# EAGLE board EMB1061_batch (EAGLE 9.6.2)
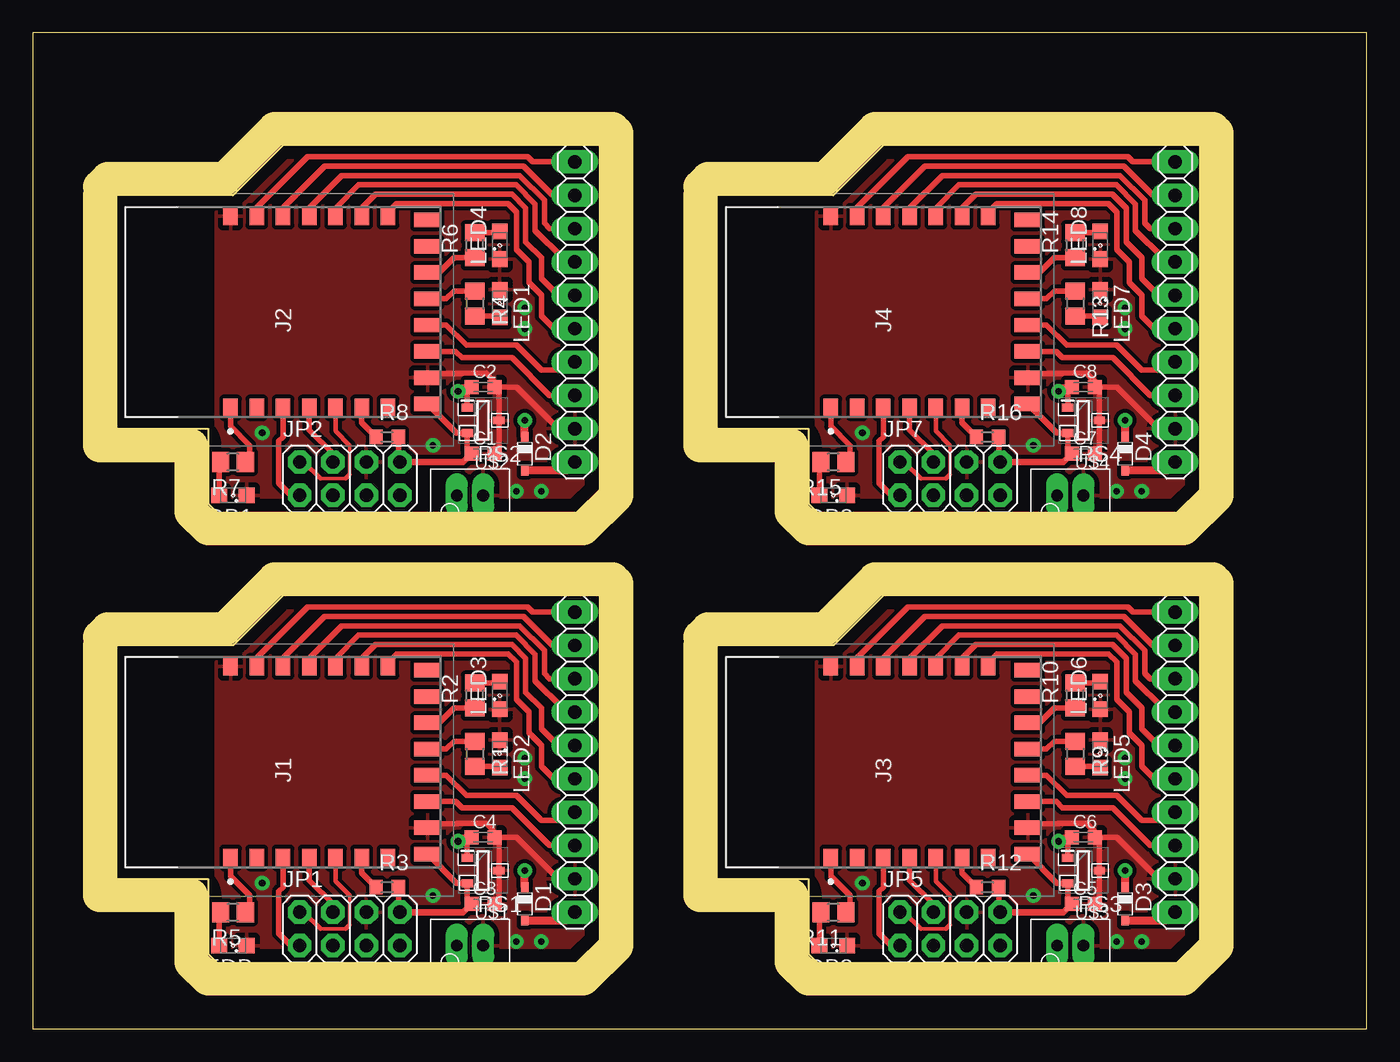
[diagram p0: board, top side]
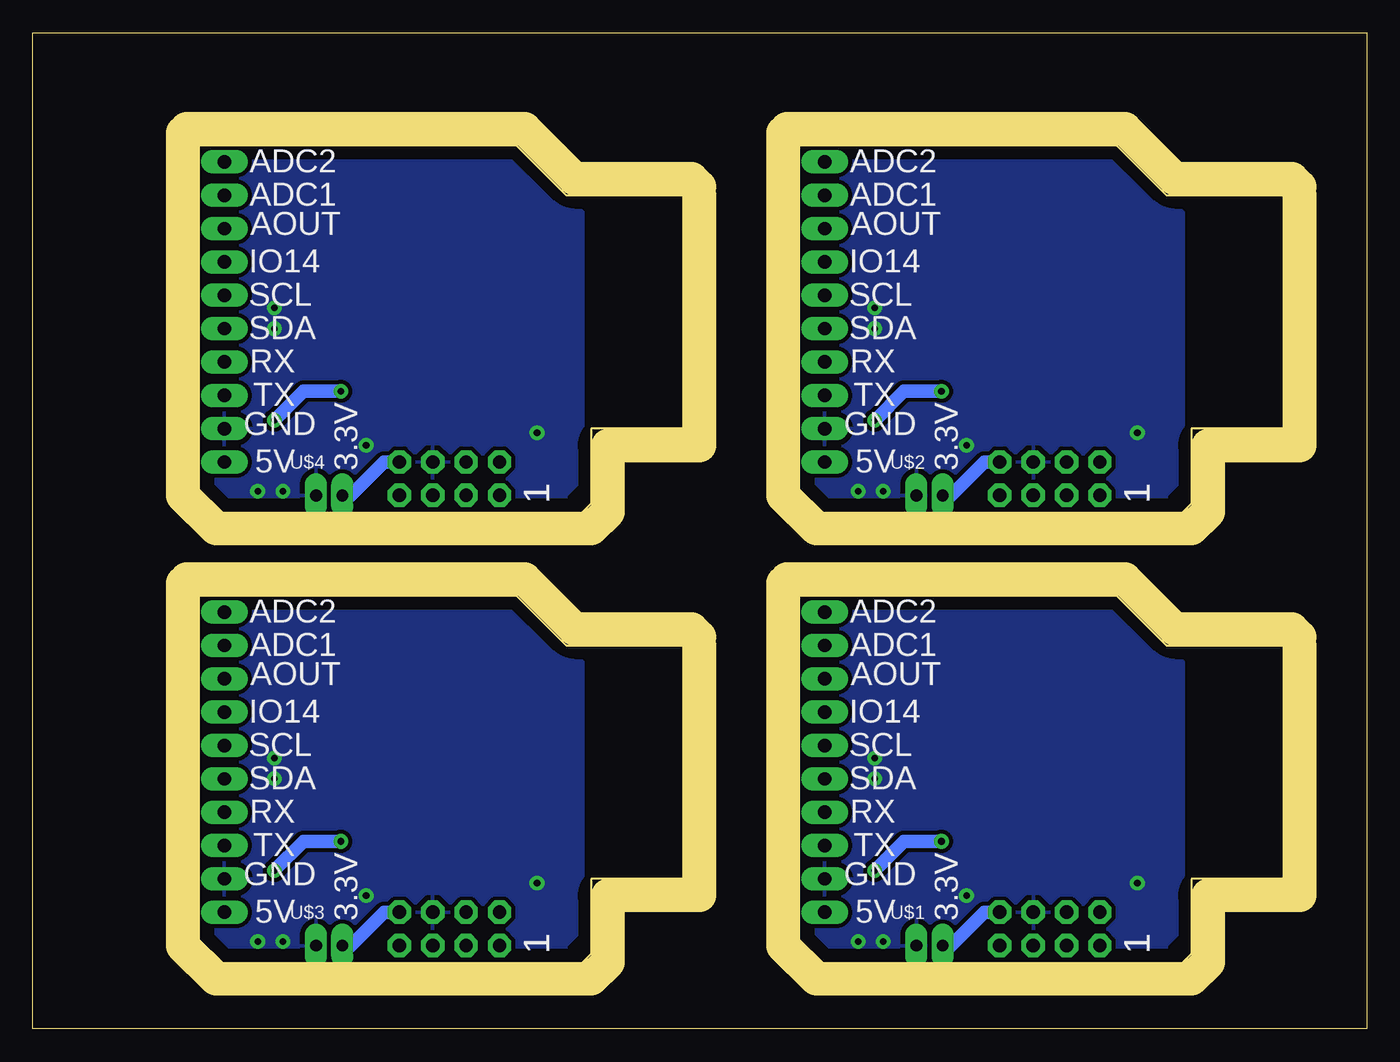
[diagram p1: board, bottom side, seen from below]

Size 101.58 x 75.87 mm. Coordinates in mm from the lower left corner, seen from the top.
Outline: 5.08,29.21 5.08,10.16 12.06,10.16 12.06,5.08 13.34,3.81 41.91,3.81 44.45,6.35 44.45,33.97 44.13,34.29 18.41,34.29 14.61,30.48 5.71,30.48 5.08,29.84
Outline: 5.08,63.5 5.08,44.45 12.06,44.45 12.06,39.37 13.34,38.1 41.91,38.1 44.45,40.64 44.45,68.26 44.13,68.58 18.41,68.58 14.61,64.77 5.71,64.77 5.08,64.14
Outline: 50.8,29.21 50.8,10.16 57.78,10.16 57.78,5.08 59.05,3.81 87.63,3.81 90.17,6.35 90.17,33.97 89.85,34.29 64.14,34.29 60.33,30.48 51.44,30.48 50.8,29.84
Outline: 50.8,63.5 50.8,44.45 57.78,44.45 57.78,39.37 59.05,38.1 87.63,38.1 90.17,40.64 90.17,68.26 89.85,68.58 64.14,68.58 60.33,64.77 51.44,64.77 50.8,64.14
Outline: 0,0 101.58,0 101.58,75.87 0,75.87 0,0
Copper layers (1*16): Top 0.035mm / dielectric 1.5mm / Bottom 0.035mm
Design rules "default *": minimum track width 6mil, minimum drill 0.35mm, track to track 12mil, track to pad 12mil, pad to pad 12mil, via to via 12mil, smd to smd 6mil, copper to edge 40mil, drill to drill 6mil, minimum pad ring 15mil, minimum via ring 12mil, stop-mask expansion 4mil, vias tented up to drill 0mil, thermal gap 16mil
Milling: 40 lines

## Footprints (pad centres in the part's own frame; a part is rotated, then mirrored left to right if it is on the bottom)
C0603K = smd 1.05 x 1.08: 1 -0.875,0; 2 0.875,0
SOD323_ST = smd 0.8 x 0.6: A 1.25,0; C -1.25,0
113990637 = smd 1.4 x 1.1: 1 -7.3,4; 2 -7.3,2; 3 -7.3,0; 4 -7.3,-2; 5 -7.3,-4; 6 -7.3,-6; 7 -7.3,-8; 16 7.3,-8; 17 7.3,-6; 18 7.3,-4; 19 7.3,-2; 20 7.3,0; 21 7.3,2; 22 7.3,4 | smd 1.1 x 2: 8 -7,-11; 9 -5,-11; 10 -3,-11; 11 -1,-11; 12 1,-11; 13 3,-11; 14 5,-11; 15 7,-11
2X04 = drill 1.016 octagon: 1 -3.81,-1.27; 2 -3.81,1.27; 3 -1.27,-1.27; 4 -1.27,1.27; 5 1.27,-1.27; 6 1.27,1.27; 7 3.81,-1.27; 8 3.81,1.27
1X10 = drill 1.016 long: 1 -11.43,0; 2 -8.89,0; 3 -6.35,0; 4 -3.81,0; 5 -1.27,0; 6 1.27,0; 7 3.81,0; 8 6.35,0; 9 8.89,0; 10 11.43,0
SML0805 = smd 1.2 x 1.2: A 1.05,0; C -1.05,0
SOT96P240X120-3N = smd 0.85 x 0.6: 1 -1.2,0.96; 2 -1.2,-0.96; 3 1.2,0
R0805 = smd 1.3 x 1.5: 1 -0.95,0; 2 0.95,0
R0603 = smd 1 x 1.1: 1 -0.85,0; 2 0.85,0
JST2.0MM_2PIN = drill 0.9 pad 1.27 long: 1 0,2; 2 0,0

## Placement (x,y rotation side)
C1  2.2uf  [C0603K]  34.29,43.81 0 top
C2  1uf  [C0603K]  34.29,48.9 0 top
C3  2.2uf  [C0603K]  34.29,9.53 0 top
C4  1uf  [C0603K]  34.29,14.61 0 top
C5  2.2uf  [C0603K]  80.01,9.53 0 top
C6  1uf  [C0603K]  80.01,14.61 0 top
C7  2.2uf  [C0603K]  80.01,43.81 0 top
C8  1uf  [C0603K]  80.01,48.9 0 top
D1  Diode  [SOD323_ST]  37.47,9.53 270 top
D2  Diode  [SOD323_ST]  37.47,43.81 270 top
D3  Diode  [SOD323_ST]  83.19,9.53 270 top
D4  Diode  [SOD323_ST]  83.19,43.81 270 top
J1  BlueNRG1  [113990637]  19.05,20.32 90 top
J2  BlueNRG1  [113990637]  19.05,54.61 90 top
J3  BlueNRG1  [113990637]  64.77,20.32 90 top
J4  BlueNRG1  [113990637]  64.77,54.61 90 top
JP1  [2X04]  24.13,7.62 0 top
JP2  [2X04]  24.13,41.91 0 top
JP3  [1X10]  41.27,20.32 270 top
JP4  [1X10]  41.27,54.61 270 top
JP5  [2X04]  69.85,7.62 0 top
JP6  [1X10]  87,20.32 270 top
JP7  [2X04]  69.85,41.91 0 top
JP8  [1X10]  87,54.61 270 top
LED1  LEDG  [SML0805]  35.56,55.24 270 top
LED2  LEDG  [SML0805]  35.56,20.95 270 top
LED3  LEDR  [SML0805]  35.56,25.4 90 top
LED4  LEDR  [SML0805]  35.56,59.69 90 top
LED5  LEDG  [SML0805]  81.28,20.95 270 top
LED6  LEDR  [SML0805]  81.28,25.4 90 top
LED7  LEDG  [SML0805]  81.28,55.24 270 top
LED8  LEDR  [SML0805]  81.28,59.69 90 top
LEDB  LEDB  [SML0805]  15.24,6.35 180 top
LEDB1  LEDB  [SML0805]  15.24,40.64 180 top
LEDB2  LEDB  [SML0805]  60.96,6.35 180 top
LEDB3  LEDB  [SML0805]  60.96,40.64 180 top
PS1  AP7381-33SA-7  [SOT96P240X120-3N]  34.29,12.06 0 top
PS2  AP7381-33SA-7  [SOT96P240X120-3N]  34.29,46.35 0 top
PS3  AP7381-33SA-7  [SOT96P240X120-3N]  80.01,12.06 0 top
PS4  AP7381-33SA-7  [SOT96P240X120-3N]  80.01,46.35 0 top
R1  1k  [R0805]  33.66,20.95 270 top
R2  1k  [R0805]  33.66,25.4 90 top
R3  10k  [R0603]  26.99,10.79 0 top
R4  1k  [R0805]  33.66,55.24 270 top
R5  1k  [R0805]  15.24,8.89 180 top
R6  1k  [R0805]  33.66,59.69 90 top
R7  1k  [R0805]  15.24,43.18 180 top
R8  10k  [R0603]  26.99,45.09 0 top
R9  1k  [R0805]  79.38,20.95 270 top
R10  1k  [R0805]  79.38,25.4 90 top
R11  1k  [R0805]  60.96,8.89 180 top
R12  10k  [R0603]  72.71,10.79 0 top
R13  1k  [R0805]  79.38,55.24 270 top
R14  1k  [R0805]  79.38,59.69 90 top
R15  1k  [R0805]  60.96,43.18 180 top
R16  10k  [R0603]  72.71,45.09 0 top
U$1  JST2.0MM_2PIN  [JST2.0MM_2PIN]  34.29,6.35 90 top
U$2  JST2.0MM_2PIN  [JST2.0MM_2PIN]  34.29,40.64 90 top
U$3  JST2.0MM_2PIN  [JST2.0MM_2PIN]  80.01,6.35 90 top
U$4  JST2.0MM_2PIN  [JST2.0MM_2PIN]  80.01,40.64 90 top

## Library data of the parts
C1-C8 = rcl; SPICEPREFIX: C
D1-D4 = diode
J1-J4 = SamacSys_Parts; DESCRIPTION: Bluetooth v4.2 (BLE) 3.3V 22-Pin; HEIGHT: 4mm; MANUFACTURER_NAME: Seeed Studio; MANUFACTURER_PART_NUMBER: 113990637; MOUSER_PART_NUMBER: 713-113990637; MOUSER_PRICE-STOCK: https://www.mouser.co.uk/ProductDetail/Seeed-Studio/113990637?qs=gZXFycFWdAMlTq%252B0pAB4jw%3D%3D
JP1-JP8 = pinhead
LED1-LED8 LEDB LEDB1-LEDB3 = led
PS1-PS4 = mouser-3.3v_AP7381-33SA-7; DESCRIPTION: LDO CMOS LowCurr SOT23 T&R 3K; HEIGHT: 1.2mm; MANUFACTURER_NAME: Diodes Inc.; MANUFACTURER_PART_NUMBER: AP7381-33SA-7; MOUSER_PART_NUMBER: 621-AP7381-33SA-7; MOUSER_PRICE-STOCK: https://www.mouser.co.uk/ProductDetail/Diodes-Incorporated/AP7381-33SA-7?qs=y6ZabgHbY%252ByfboEZm%252BnPlA%3D%3D
R1-R16 = rcl; SPICEPREFIX: R
U$1-U$4 = Gil

## Nets
+5V: D1.A JP3.10
+5V1: D2.A JP4.10
+5V2: D3.A JP6.10
+5V3: D4.A JP8.10
ADC1: J1.20 JP3.2
ADC2: J1.21 JP3.1
ADC3: J2.20 JP4.2
ADC4: J2.21 JP4.1
ADC5: J3.20 JP6.2
ADC6: J3.21 JP6.1
ADC7: J4.20 JP8.2
ADC8: J4.21 JP8.1
ANALOG_OUT: J1.19 JP3.3
ANALOG_OUT1: J2.19 JP4.3
ANALOG_OUT2: J3.19 JP6.3
ANALOG_OUT3: J4.19 JP8.3
BLUE: J1.1 R5.1
BLUE1: J2.1 R7.1
BLUE2: J3.1 R11.1
BLUE3: J4.1 R15.1
BOOT: J1.6 R3.1
BOOT1: J2.6 R8.1
BOOT2: J3.6 R12.1
BOOT3: J4.6 R16.1
GND: C3.2 C4.2 J1.9 J1.22 JP1.6 JP3.9 LED2.C LED3.C LEDB.C PS1.3 U$1.2
GND1: C1.2 C2.2 J2.9 J2.22 JP2.6 JP4.9 LED1.C LED4.C LEDB1.C PS2.3 U$2.2
GND2: C5.2 C6.2 J3.9 J3.22 JP5.6 JP6.9 LED5.C LED6.C LEDB2.C PS3.3 U$3.2
GND3: C7.2 C8.2 J4.9 J4.22 JP7.6 JP8.9 LED7.C LED8.C LEDB3.C PS4.3 U$4.2
I2C2_SCL: J1.17 JP3.5
I2C2_SCL1: J2.17 JP4.5
I2C2_SCL2: J3.17 JP6.5
I2C2_SCL3: J4.17 JP8.5
I2C2_SDA: J1.16 JP3.6
I2C2_SDA1: J2.16 JP4.6
I2C2_SDA2: J3.16 JP6.6
I2C2_SDA3: J4.16 JP8.6
IO1: J2.18 JP4.4
IO2: J3.18 JP6.4
IO3: J4.18 JP8.4
IO14: J1.18 JP3.4
LED1: J1.12 R1.1
LED2: J1.13 R2.1
LED3: J1.14
LED4: J1.15
LED5: J2.12 R4.1
LED6: J2.13 R6.1
LED7: J2.14
LED8: J2.15
LED9: J3.12 R9.1
LED10: J3.13 R10.1
LED11: J3.14
LED12: J3.15
LED13: J4.12 R13.1
LED14: J4.13 R14.1
LED15: J4.14
LED16: J4.15
N$1: LEDB.A R5.2
N$2: LED1.A R4.2
N$3: LED4.A R6.2
N$4: LEDB1.A R7.2
N$5: LED5.A R9.2
N$6: LED6.A R10.2
N$7: LEDB2.A R11.2
N$8: LED7.A R13.2
N$9: LED8.A R14.2
N$10: LEDB3.A R15.2
N$20: LED2.A R1.2
N$21: LED3.A R2.2
RESET: J1.3 JP1.1
RESET1: J2.3 JP2.1
RESET2: J3.3 JP5.1
RESET3: J4.3 JP7.1
RX: J1.11 JP3.7
RX1: J2.11 JP4.7
RX2: J3.11 JP6.7
RX3: J4.11 JP8.7
SWCLK: J1.5 JP1.2
SWCLK1: J2.5 JP2.2
SWCLK2: J3.5 JP5.2
SWCLK3: J4.5 JP7.2
SWDIO: J1.4 JP1.4
SWDIO1: J2.4 JP2.4
SWDIO2: J3.4 JP5.4
SWDIO3: J4.4 JP7.4
TX: J1.10 JP3.8
TX1: J2.10 JP4.8
TX2: J3.10 JP6.8
TX3: J4.10 JP8.8
VCC: C3.1 J1.8 JP1.8 PS1.2 R3.2 U$1.1
VCC1: C1.1 J2.8 JP2.8 PS2.2 R8.2 U$2.1
VCC2: C5.1 J3.8 JP5.8 PS3.2 R12.2 U$3.1
VCC3: C7.1 J4.8 JP7.8 PS4.2 R16.2 U$4.1
VIN: C4.1 D1.C PS1.1
VIN1: C2.1 D2.C PS2.1
VIN2: C6.1 D3.C PS3.1
VIN3: C8.1 D4.C PS4.1

## Tracks (layer width: path | path; a pad name or v marks a point on that pad's centre or on a via)
+5V
  Top 0.61: D1.A 40.66,8.28 JP3.10
+5V1
  Top 0.61: D2.A 40.66,42.56 JP4.10
+5V2
  Top 0.61: D3.A 86.38,8.28 JP6.10
+5V3
  Top 0.61: D4.A 86.38,42.56 JP8.10
ADC1
  Top 0.406: JP3.2 39.58,29.21 37.37,31.42 22.21,31.42 19.05,28.25 J1.20
ADC2
  Top 0.406: JP3.1 38.05,31.75 37.67,32.13 20.93,32.13 17.05,28.25 J1.21
ADC3
  Top 0.406: JP4.2 39.58,63.5 37.37,65.71 22.21,65.71 19.05,62.55 J2.20
ADC4
  Top 0.406: JP4.1 38.05,66.04 37.67,66.42 20.93,66.42 17.05,62.55 J2.21
ADC5
  Top 0.406: JP6.2 85.3,29.21 83.09,31.42 67.94,31.42 64.77,28.25 J3.20
ADC6
  Top 0.406: JP6.1 83.77,31.75 83.39,32.13 66.65,32.13 62.77,28.25 J3.21
ADC7
  Top 0.406: JP8.2 85.3,63.5 83.09,65.71 67.94,65.71 64.77,62.55 J4.20
ADC8
  Top 0.406: JP8.1 83.77,66.04 83.39,66.42 66.65,66.42 62.77,62.55 J4.21
ANALOG_OUT
  Top 0.406: J1.19 21.05,28.22 23.54,30.71 37.08,30.71 38.96,28.82 38.96,27.08 39.37,26.67 JP3.3
ANALOG_OUT1
  Top 0.406: J2.19 21.05,62.51 23.54,65 37.08,65 38.96,63.11 38.96,61.37 39.37,60.96 JP4.3
ANALOG_OUT2
  Top 0.406: J3.19 66.77,28.22 69.25,30.71 82.8,30.71 84.68,28.82 84.68,27.08 85.09,26.67 JP6.3
ANALOG_OUT3
  Top 0.406: J4.19 66.77,62.51 69.25,65 82.8,65 84.68,63.11 84.68,61.37 85.09,60.96 JP8.3
BLUE
  Top 0.406: J1.1 15.05,11.62 16.51,10.16 16.51,9.21 R5.1
BLUE1
  Top 0.406: J2.1 15.05,45.91 16.51,44.45 16.51,43.5 R7.1
BLUE2
  Top 0.406: J3.1 60.77,11.62 62.23,10.16 62.23,9.21 R11.1
BLUE3
  Top 0.406: J4.1 60.77,45.91 62.23,44.45 62.23,43.5 R15.1
BOOT
  Top 0.406: J1.6 25.05,11.88 R3.1
BOOT1
  Top 0.406: J2.6 25.05,46.17 R8.1
BOOT2
  Top 0.406: J3.6 70.77,11.88 R12.1
BOOT3
  Top 0.406: J4.6 70.77,46.17 R16.1
GND  (via drill 0.5)
  Top 0.406: JP3.9 40.01,11.43 36.83,14.61 35.56,14.61 | 35.56,14.61 C4.2 35.49,14.28 PS1.3 35.49,9.85 C3.2 | J1.9 30.37,15.64 32.35,15.64 32.36,15.65 34.51,15.65 35.56,14.61
  other vias: 17.46,11.11 37.47,19.05 36.83,6.67 38.73,6.67 30.48,10.16 37.47,20.64
  pour Bottom: 13.97,27.94 19.05,33.02 40.64,33.02 41.91,31.75 41.91,6.35 40.64,5.08 15.24,5.08 15.24,6.35 13.97,7.62
  pour Top: 13.97,27.94 19.05,33.02 41.91,33.02 41.91,5.08 15.24,5.08 13.97,6.35
GND1  (via drill 0.5)
  Top 0.406: JP4.9 40.01,45.72 36.83,48.9 35.56,48.9 | 35.56,48.9 C2.2 35.49,48.57 PS2.3 35.49,44.14 C1.2 | J2.9 30.37,49.93 32.66,49.93 32.68,49.94 34.51,49.94 35.56,48.9
  other vias: 17.46,45.4 37.47,53.34 36.83,40.96 38.73,40.96 30.48,44.45 37.47,54.93
  pour Bottom: 13.97,62.23 19.05,67.31 40.64,67.31 41.91,66.04 41.91,40.64 40.64,39.37 15.24,39.37 15.24,40.64 13.97,41.91
  pour Top: 13.97,62.23 19.05,67.31 41.91,67.31 41.91,39.37 15.24,39.37 13.97,40.64
GND2  (via drill 0.5)
  Top 0.406: JP6.9 85.72,11.43 82.55,14.61 81.28,14.61 | 81.28,14.61 C6.2 81.21,14.28 PS3.3 81.21,9.85 C5.2 | J3.9 76.09,15.64 78.07,15.64 78.08,15.65 80.23,15.65 81.28,14.61
  other vias: 63.18,11.11 83.19,19.05 82.55,6.67 84.45,6.67 76.2,10.16 83.19,20.64
  pour Bottom: 59.69,27.94 64.77,33.02 86.36,33.02 87.63,31.75 87.63,6.35 86.36,5.08 60.96,5.08 60.96,6.35 59.69,7.62
  pour Top: 59.69,27.94 64.77,33.02 87.63,33.02 87.63,5.08 60.96,5.08 59.69,6.35
GND3  (via drill 0.5)
  Top 0.406: JP8.9 85.72,45.72 82.55,48.9 81.28,48.9 | 81.28,48.9 C8.2 81.21,48.57 PS4.3 81.21,44.14 C7.2 | J4.9 76.09,49.93 78.38,49.93 78.4,49.94 80.23,49.94 81.28,48.9
  other vias: 63.18,45.4 83.19,53.34 82.55,40.96 84.45,40.96 76.2,44.45 83.19,54.93
  pour Bottom: 59.69,62.23 64.77,67.31 86.36,67.31 87.63,66.04 87.63,40.64 86.36,39.37 60.96,39.37 60.96,40.64 59.69,41.91
  pour Top: 59.69,62.23 64.77,67.31 87.63,67.31 87.63,39.37 60.96,39.37 59.69,40.64
I2C2_SCL
  Top 0.406: J1.17 25.05,28.22 26.11,29.29 36.49,29.29 37.54,28.23 37.54,25.64 38.73,24.45 38.73,22.86 40.01,21.59 JP3.5
I2C2_SCL1
  Top 0.406: J2.17 25.05,62.51 26.11,63.58 36.49,63.58 37.54,62.52 37.54,59.93 38.73,58.74 38.73,57.15 40.01,55.88 JP4.5
I2C2_SCL2
  Top 0.406: J3.17 70.77,28.22 71.83,29.29 82.21,29.29 83.26,28.23 83.26,25.64 84.45,24.45 84.45,22.86 85.72,21.59 JP6.5
I2C2_SCL3
  Top 0.406: J4.17 70.77,62.51 71.83,63.58 82.21,63.58 83.26,62.52 83.26,59.93 84.45,58.74 84.45,57.15 85.72,55.88 JP8.5
I2C2_SDA
  Top 0.406: J1.16 27.05,27.94 27.69,28.57 36.2,28.57 36.83,27.94 36.83,25.08 37.78,24.13 37.78,22.54 38.73,21.59 38.73,20 39.69,19.05 JP3.6
I2C2_SDA1
  Top 0.406: J2.16 27.05,62.23 27.69,62.87 36.2,62.87 36.83,62.23 36.83,59.37 37.78,58.42 37.78,56.83 38.73,55.88 38.73,54.29 39.69,53.34 JP4.6
I2C2_SDA2
  Top 0.406: J3.16 72.77,27.94 73.41,28.57 81.92,28.57 82.55,27.94 82.55,25.08 83.5,24.13 83.5,22.54 84.45,21.59 84.45,20 85.41,19.05 JP6.6
I2C2_SDA3
  Top 0.406: J4.16 72.77,62.23 73.41,62.87 81.92,62.87 82.55,62.23 82.55,59.37 83.5,58.42 83.5,56.83 84.45,55.88 84.45,54.29 85.41,53.34 JP8.6
IO1
  Top 0.406: J2.18 23.05,62.51 24.82,64.29 36.78,64.29 38.25,62.82 38.25,60.81 40.32,58.74 40.32,58.42 JP4.4
IO2
  Top 0.406: J3.18 68.77,28.22 70.54,30 82.5,30 83.97,28.53 83.97,26.52 86.04,24.45 86.04,24.13 JP6.4
IO3
  Top 0.406: J4.18 68.77,62.51 70.54,64.29 82.5,64.29 83.97,62.82 83.97,60.81 86.04,58.74 86.04,58.42 JP8.4
IO14
  Top 0.406: J1.18 23.05,28.22 24.82,30 36.78,30 38.25,28.53 38.25,26.52 40.32,24.45 40.32,24.13 JP3.4
LED1
  Top 0.406: J1.12 31.48,21.32 32.06,21.91 R1.1
LED2
  Top 0.406: J1.13 30.94,23.32 32.07,24.45 R2.1
LED5
  Top 0.406: J2.12 31.48,55.61 32.06,56.2 R4.1
LED6
  Top 0.406: J2.13 30.94,57.61 32.07,58.74 R6.1
LED9
  Top 0.406: J3.12 77.2,21.32 77.78,21.91 R9.1
LED10
  Top 0.406: J3.13 76.66,23.32 77.79,24.45 R10.1
LED13
  Top 0.406: J4.12 77.2,55.61 77.78,56.2 R13.1
LED14
  Top 0.406: J4.13 76.66,57.61 77.79,58.74 R14.1
N$1
  Top 0.406: R5.2 14.19,8.79 LEDB.A
N$2
  Top 0.406: R4.2 35.46,54.3 LED1.A
N$3
  Top 0.406: R6.2 35.46,60.64 LED4.A
N$4
  Top 0.406: R7.2 14.19,43.08 LEDB1.A
N$5
  Top 0.406: R9.2 81.18,20 LED5.A
N$6
  Top 0.406: R10.2 81.18,26.35 LED6.A
N$7
  Top 0.406: R11.2 59.91,8.79 LEDB2.A
N$8
  Top 0.406: R13.2 81.18,54.3 LED7.A
N$9
  Top 0.406: R14.2 81.18,60.64 LED8.A
N$10
  Top 0.406: R15.2 59.91,43.08 LEDB3.A
N$20
  Top 0.406: R1.2 35.46,20 LED2.A
N$21
  Top 0.406: R2.2 35.46,26.35 LED3.A
RESET
  Top 0.406: J1.3 19.05,10.79 18.73,10.48 18.73,7.3 19.68,6.35 JP1.1
RESET1
  Top 0.406: J2.3 19.05,45.09 18.73,44.77 18.73,41.59 19.68,40.64 JP2.1
RESET2
  Top 0.406: J3.3 64.77,10.79 64.45,10.48 64.45,7.3 65.41,6.35 JP5.1
RESET3
  Top 0.406: J4.3 64.77,45.09 64.45,44.77 64.45,41.59 65.41,40.64 JP7.1
RX
  Top 0.406: J1.11 31.48,19.32 33.02,17.78 36.83,17.78 38.73,15.88 40.64,15.88 JP3.7
RX1
  Top 0.406: J2.11 31.48,53.61 33.02,52.07 36.83,52.07 38.73,50.16 40.64,50.16 JP4.7
RX2
  Top 0.406: J3.11 77.2,19.32 78.74,17.78 82.55,17.78 84.45,15.88 86.36,15.88 JP6.7
RX3
  Top 0.406: J4.11 77.2,53.61 78.74,52.07 82.55,52.07 84.45,50.16 86.36,50.16 JP8.7
SWCLK
  Top 0.254: 24.13,10.16 24.13,7.94 | 23.81,7.62 21.91,7.62
  Top 0.356: J1.5 23.05,11.24 24.13,10.16 | 24.13,7.94 23.81,7.62 | JP1.2 20.64,8.89 21.91,7.62
SWCLK1
  Top 0.254: 24.13,44.45 24.13,42.23 | 23.81,41.91 21.91,41.91
  Top 0.356: J2.5 23.05,45.53 24.13,44.45 | 24.13,42.23 23.81,41.91 | JP2.2 20.64,43.18 21.91,41.91
SWCLK2
  Top 0.254: 69.85,10.16 69.85,7.94 | 69.53,7.62 67.63,7.62
  Top 0.356: J3.5 68.77,11.24 69.85,10.16 | 69.85,7.94 69.53,7.62 | JP5.2 66.36,8.89 67.63,7.62
SWCLK3
  Top 0.254: 69.85,44.45 69.85,42.23 | 69.53,41.91 67.63,41.91
  Top 0.356: J4.5 68.77,45.53 69.85,44.45 | 69.85,42.23 69.53,41.91 | JP7.2 66.36,43.18 67.63,41.91
SWDIO
  Top 0.406: JP1.4 22.86,9.53 21.05,11.34 J1.4
SWDIO1
  Top 0.406: JP2.4 22.86,43.81 21.05,45.62 J2.4
SWDIO2
  Top 0.406: JP5.4 68.58,9.53 66.77,11.34 J3.4
SWDIO3
  Top 0.406: JP7.4 68.58,43.81 66.77,45.62 J4.4
TX
  Top 0.406: J1.10 32.21,17.32 32.7,16.83 36.51,16.83 39.37,13.97 JP3.8
TX1
  Top 0.406: J2.10 32.21,51.61 32.7,51.12 36.51,51.12 39.37,48.26 JP4.8
TX2
  Top 0.406: J3.10 77.93,17.32 78.42,16.83 82.23,16.83 85.09,13.97 JP6.8
TX3
  Top 0.406: J4.10 77.93,51.61 78.42,51.12 82.23,51.12 85.09,48.26 JP8.8
VCC
  Top 0.406: C3.1 33.09,9.85 PS1.2 32.27,11.11 J1.8 | R3.2 27.84,8.99 JP1.8
  Top 0.508: C3.1 32.78,8.89 JP1.8
  Bottom 1.016: U$1.1 31.66,6.35 29.11,8.89 JP1.8
VCC1
  Top 0.406: C1.1 33.09,44.14 PS2.2 32.27,45.4 J2.8 | R8.2 27.84,43.28 JP2.8
  Top 0.508: C1.1 32.78,43.18 JP2.8
  Bottom 1.016: U$2.1 31.66,40.64 29.11,43.18 JP2.8
VCC2
  Top 0.406: C5.1 78.81,9.85 PS3.2 77.98,11.11 J3.8 | R12.2 73.56,8.99 JP5.8
  Top 0.508: C5.1 78.5,8.89 JP5.8
  Bottom 1.016: U$3.1 77.38,6.35 74.83,8.89 JP5.8
VCC3
  Top 0.406: C7.1 78.81,44.14 PS4.2 77.98,45.4 J4.8 | R16.2 73.56,43.28 JP7.8
  Top 0.508: C7.1 78.5,43.18 JP7.8
  Bottom 1.016: U$4.1 77.38,40.64 74.83,43.18 JP7.8
VIN  (via drill 0.5)
  Top 0.406: PS1.1 33.09,14.28 C4.1 32.7,14.61 v32.38,14.29
  Top 0.61: D1.C v37.47,12.06
  Bottom 1.016: v37.47,12.06 35.24,14.29 v32.38,14.29
VIN1  (via drill 0.5)
  Top 0.406: PS2.1 33.09,48.57 C2.1 32.7,48.9 v32.38,48.58
  Top 0.61: D2.C v37.47,46.35
  Bottom 1.016: v37.47,46.35 35.24,48.58 v32.38,48.58
VIN2  (via drill 0.5)
  Top 0.406: PS3.1 78.81,14.28 C6.1 78.42,14.61 v78.11,14.29
  Top 0.61: D3.C v83.19,12.06
  Bottom 1.016: v83.19,12.06 80.96,14.29 v78.11,14.29
VIN3  (via drill 0.5)
  Top 0.406: PS4.1 78.81,48.57 C8.1 78.42,48.9 v78.11,48.58
  Top 0.61: D4.C v83.19,46.35
  Bottom 1.016: v83.19,46.35 80.96,48.58 v78.11,48.58

## Text on the board
bNames: ADC2 | ADC2 | ADC1 | ADC1 | AOUT | AOUT | IO14 | IO14 | SCL | SCL | SDA | SDA | RX | RX | TX | TX | GND | GND | 5V | 5V | 3.3V | 3.3V | 1 | 1 | ADC2 | ADC2 | ADC1 | ADC1 | AOUT | AOUT | IO14 | IO14 | SCL | SCL | SDA | SDA | RX | RX | TX | TX | GND | GND | 5V | 5V | 3.3V | 3.3V | 1 | 1